# Altium PCB ESP32.PcbDoc
Units mm, origin at the board's own origin, x right, y up, seen from the top; angles counter-clockwise.
Board outline 152.4 x 101.6 mm, 2 copper layers (Top Layer, Bottom Layer); 40 components, 49 nets, 212 pads, 10 vias.
Unrouted connection lines stored in the file: 93.
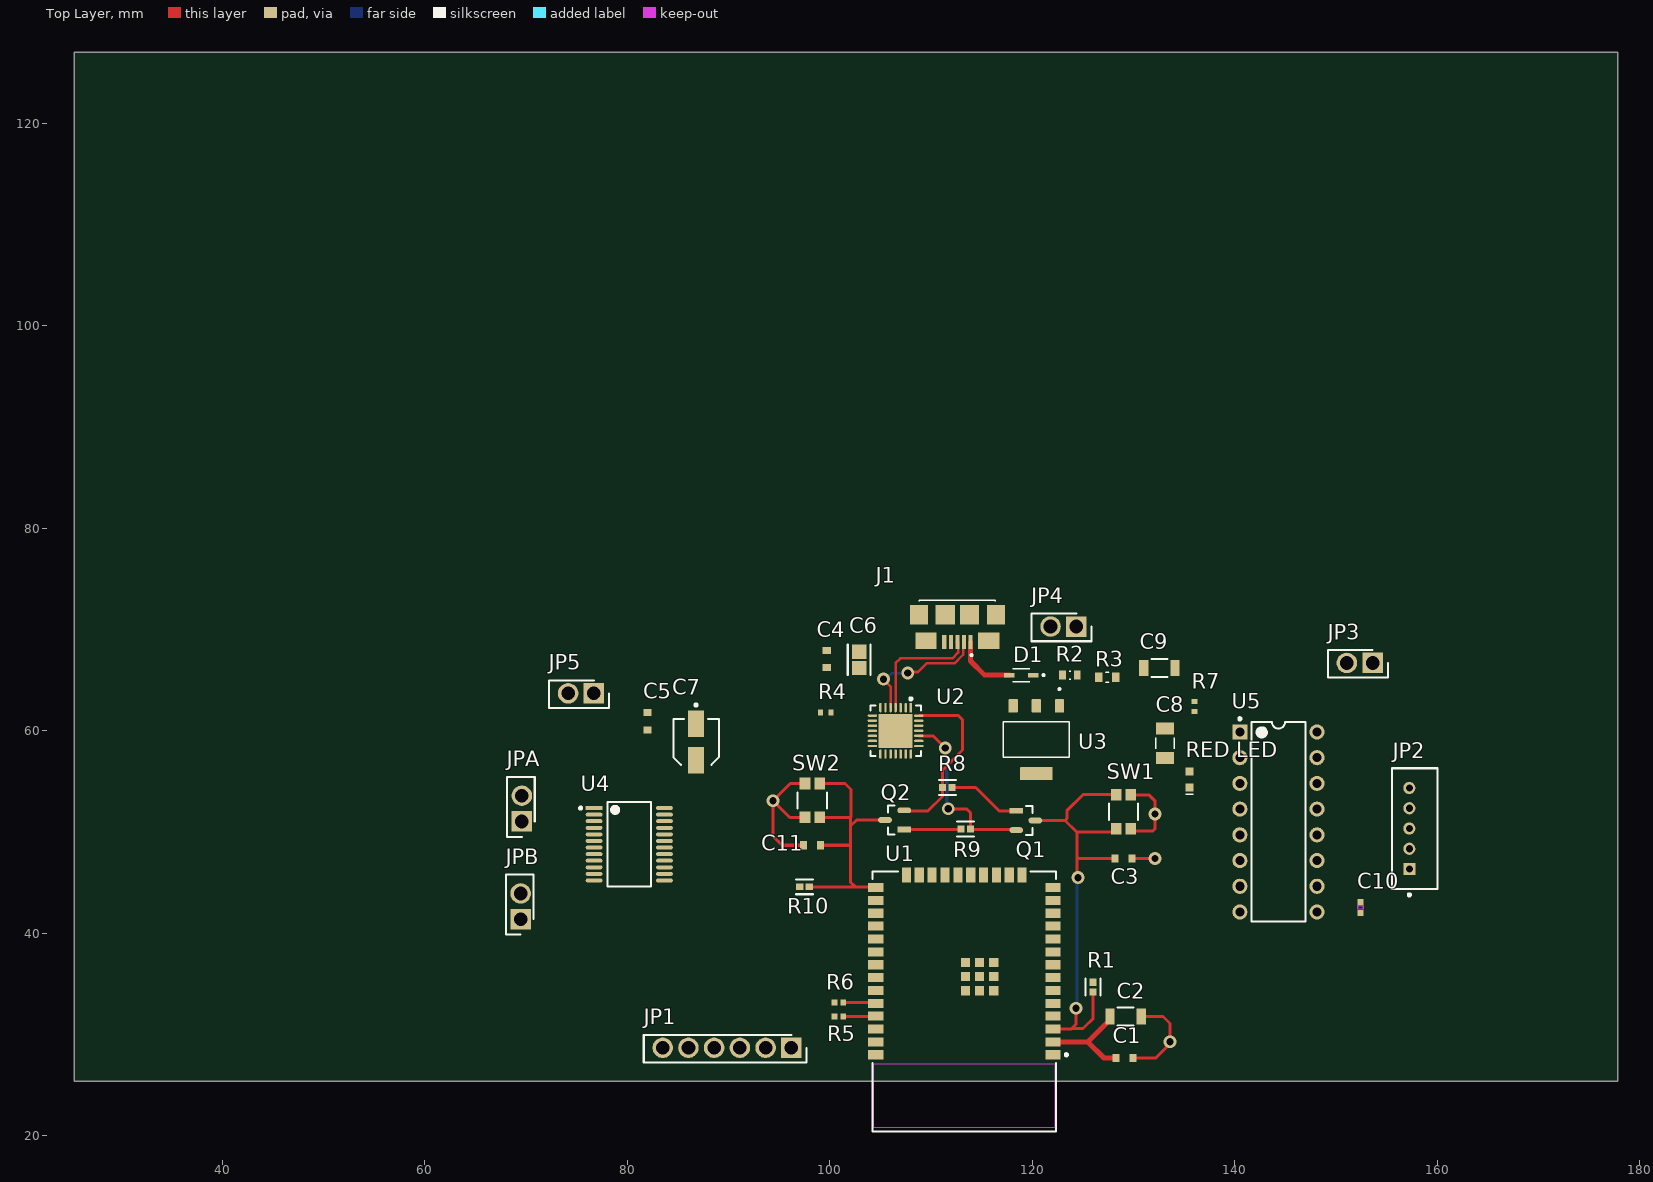
[diagram p0: Top Layer view]
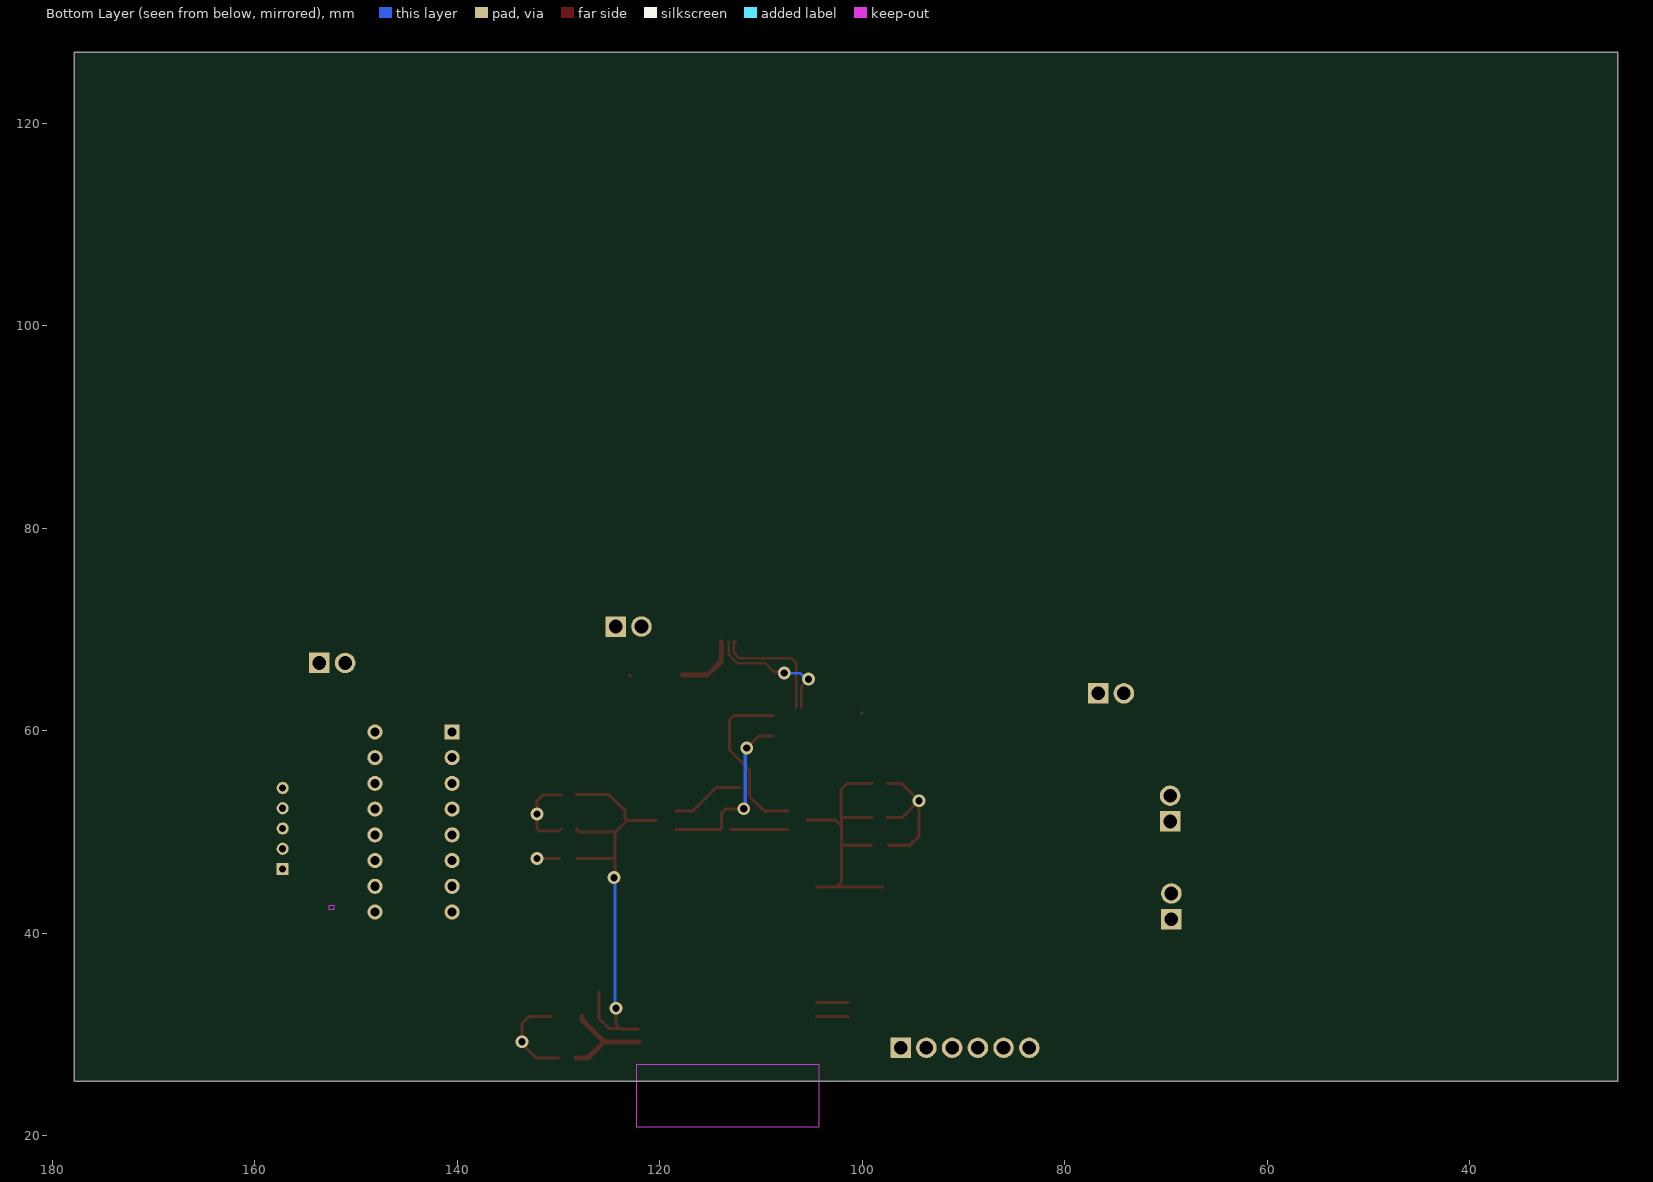
[diagram p1: Bottom Layer view, seen from below]

## Layer stack, top to bottom
Top Solder: solder mask 0.0102, Solder Resist, Dk 3.5
Top Layer: signal copper 0.0356
Dielectric 1: dielectric 0.32, FR-4, Dk 4.8
Bottom Layer: signal copper 0.0356
Bottom Solder: solder mask 0.0102, Solder Resist, Dk 3.5

## Board outline
25.4,25.4 177.8,25.4 177.8,127 25.4,127

## Design rules (kind name [scope] priority, off if disabled: settings)
Clearance [All] p1: gap=0.3 ignorepadtopadclearanceinfootprint=FALSE except(0.125: Arc-Text Track-Text SMDPad-Text THPad-Text Via-Text Fill-Text Poly-Text Region-Text Text-Text; 0.15: Arc-Arc Arc-Track Arc-Fill Arc-Poly Arc-Region Track-Track Track-Fill Track-Poly Track-Region Fill-Fill Fill-Poly Fill-Region Poly-Poly Poly-Region Region-Region; 0.2: Arc-SMDPad Track-SMDPad SMDPad-SMDPad; 0.25: Arc-THPad Arc-Hole Track-THPad Track-Hole SMDPad-THPad SMDPad-Hole THPad-THPad THPad-Hole Via-Hole Fill-Hole Poly-Hole Region-Hole Text-Hole)
DiffPairsRouting [All] p1: maxlimit=0.254 minlimit=0.2 mostfreqgap=0.25 toplayer_minwidth=0.2 toplayer_maxwidth=0.4 toplayer_prefwidth=0.25 bottomlayer_minwidth=0.2 bottomlayer_maxwidth=0.4 bottomlayer_prefwidth=0.25 maxuncoupledlength=12.7
HoleSize [All] p1: absolutevalues=TRUE maxlimit=0.45 minlimit=0.3 maxpercent=80.000 minpercent=20.000
HoleToHoleClearance [All] p1: gap=0.3 allowstackedmicrovias=TRUE
MinimumAnnularRing [All] p1: minimumring=0.2
PolygonConnect [All] p1: connectstyle=Relief reliefconductorwidth=0.254 reliefentries=4 polygonreliefangle="90 Angle" airgapwidth=0.254
RoutingVias [All] p1: holewidth=0.35 width=0.8 viastyle="Through Hole" minholewidth=0.3 minwidth=0.7 maxholewidth=0.45 maxwidth=0.85
SolderMaskExpansion [All] p1: expansion=0.102 istentingtop=FALSE
SupplyNets "Schematic Supply Nets_1" [InNet('VDD33')] p1: voltage=0.000
SupplyNets "Schematic Supply Nets" [InNet('GND')] p2: voltage=0.000
UnRoutedNet [All] p1: checkbadconnections=TRUE
Width [All] p1: maxlimit=0.5 minlimit=0.2 preferedwidth=0.3 minimp=50.000000 maximp=50.000000 favimp=50.000000
26 further rules are at their usual default settings.

## Classes and differential pairs
differential pair class DIFF90: USB_D
differential pair USB_D: +USB_D_P -USB_D_N

## Components (designator, comment, footprint, x,y, rotation, side; value= is the part's Value field where it differs from the comment)
C1 "0.1 µF ±10%, 50V" 885012206095 129.1,27.7 r180 top
C2 "22 µF ±20%, 10V" 885012108011 129.2,31.8 r180 top
C3 "0.1 µF ±10%, 50V" 885012206095 129,47.4 r180 top
C4 "0.1 µF ±10%, 50V" 885012206095 99.7,67.1 r270 top
C5 "0.1 µF ±10%, 50V" 885012206095 82,60.95 r90 top
C6 "4.7uF" FP-C0805C475J4RACAUTO-IPC_B 102.9,67 r90 top
C7 "10 µF" FP-UWT1C100MCL1GB-MFG 86.8,58.9 r270 top value=10uF
C8 "22uf 25V" CL31A226KAHNNNE 133.1,58.76 r90 top value=22uF
C9 "22 µF ±20%, 10V" 885012108011 132.55,66.2 r180 top
C10 "10nf" C0402C103K3REC7411 152.4,42.545 r270 top
C11 "0.1 µF ±10%, 50V" 885012206095 98.25,48.7 r0 top
D1 "BAT760-7" BAT760-7 118.91,65.5 r180 top
J1 "USB_CON" 10118192-0002LF 112.6,68.775 r180 top
JP1 "PPPC061LFBN-RC" PPPC061LFBN-RC 96.2,28.7 r180 top
JP2 "B5B-XH-A" FP-B5B-PH-K-S_LF_SN-MFG 157.776,50.355 r90 top
JP3 "PPTC021LFBN-RC" PPTC021LFBN-RC 153.6,66.7 r180 top
JP4 "PPTC021LFBN-RC" PPTC021LFBN-RC 124.34,70.3 r180 top
JP5 "PPTC021LFBN-RC" PPTC021LFBN-RC 76.7,63.7 r180 top
JPA "PPTC021LFBN-RC" PPTC021LFBN-RC 69.596,51.054 r90 top
JPB "PPTC021LFBN-RC" PPTC021LFBN-RC 69.469,41.402 r90 top
Q1 "SS8050-G" FP-SS8050-G-IPC_B 119.351,51.15 r0 top
Q2 "SS8050-G" FP-SS8050-G-IPC_B 106.4,51.2 r180 top
R1 "10k" FP-RC0402-0_4-IPC_A 126,34.7 r90 top value=10kR
R2 "47.5K" ERJ3EKF4752V 123.7,65.5 r0 top value=47.5kR
R3 "22.1K" RC0603FR-0722K1L 127.4,65.3 r180 top value=22.1kR
R4 "2K Ohm" 560112110015 99.6,61.8 r0 top
R5 "0k" CR0402AJ/-000GAS 100.9,31.8 r0 top
R6 "0k" CR0402AJ/-000GAS 100.9,33.154 r180 top
R7 "2K Ohm" 560112110015 136,62.4 r90 top
R8 "10k" FP-RC0402-0_4-IPC_A 111.6,54.4 r0 top value=10kR
R9 "10k" FP-RC0402-0_4-IPC_A 113.421,50.3 r180 top value=10kR
R10 "10k" FP-RC0402-0_4-IPC_A 97.5,44.6 r180 top value=10kR
"RED LED" "150060SS75000" 150060SS75000 135.5,55.2 r90 top
SW1 "434153017835" 434153017835 129,52 r270 top
SW2 "434153017835" 434153017835 98.275,53.125 r90 top
U1 "ESP32-WROOM-32E-N4" FP-ESP32-WROOM-32E_4MB-MFG 113.284,33.274 r180 top
U2 "CP2102N-A02-GQFN28" FP-CP2102N-A02-GQFN28-IPC_C 106.5,60 r270 top
U3 "3.3V reg" AMS1117-3.3 120.389,59.121 r270 top
U4 "TB6612FNG" FP-SSOP24-P-300-0_65A-IPC_B 80.2,48.8 r0 top
U5 "ULN2003A" STM-DIP-16L 144.3,51 r0 top

## Footprints (in the part's own frame and the unit in brackets; to place one, negate y for a bottom-side part, rotate by r counter-clockwise, add the part's x,y. Pads: shape width x height; smd on the part's side, far side on the other; paste and mask are expansions set on the pad)
150060SS75000 [mm] "SMD Mono-color Chip LED, body 1.6x0.8mm"
  rect 0.8x0.8 smd: 1(-0.8,0) 2(0.8,0)
  silkscreen extent -1.55,-0.4 -1.4,0.4, body extent -0.8,-0.4 0.8,0.4, height 0.7
10118192-0002LF [mm]
  rect 0.4x1.35 smd: 1(-1.3,0) 2(-0.65,0) 3(0,0) 4(0.65,0) 5(1.3,0)
  rect 2.1x1.6 smd: S1(-3.1,-0.125) S2(3.1,-0.125)
  rect 1.8x1.9 smd: S3(-3.8,-2.675) S6(3.8,-2.675)
  rect 1.9x1.9 smd: S4(-1.2,-2.675) S5(1.2,-2.675)
  silkscreen extent -3.75,-4.13 3.75,1.4, body extent -3.95,-4.82 3.95,0.28, height 2.7
434153017835 [mm] "Tact Switch, SMD, body 3.5x2.9mm"
  rect 1.15x1.05 smd: A1(-1.675,0.725) A2(1.675,0.725) B1(-1.675,-0.725) B2(1.675,-0.725)
  silkscreen extent -0.8,-1.45 0.8,1.45, body extent -2.15,-1.45 2.15,1.45, height 1.7
560112110015 [mm] "Fixed Thick Film, body 1.00 x 0.50 mm"
  rect 0.5x0.6 smd: 1(-0.5,0) 2(0.5,0)
  body extent -0.5,-0.25 0.5,0.25, height 0.35
885012108011 [mm] "Ceramic Capacitors, body 3.2x1.6mm"
  rect 0.9x1.6 smd: 1(-1.55,0) 2(1.55,0)
  silkscreen extent -0.8,-0.87 0.8,0.87, body extent -1.6,-0.8 1.6,0.8, height 1.25
885012206095 [mm] "Ceramic Capacitors, 0603, body 1.6x0.8mm"
  rect 0.7x0.8 smd: 1(-0.85,0) 2(0.85,0)
  body extent -0.8,-0.4 0.8,0.4, height 0.8
AMS1117-3.3 [mm]
  rrect15% 1.31x0.93 smd: 1(-3.345,2.29) 2(-3.345,0) 3(-3.345,-2.29)
  rrect15% 1.31x3.24 smd: 4(3.345,0)
  silkscreen extent -5.1,-3.25 1.75,3.25, body extent -3.5,-3.25 3.5,3.25, height 1.8
BAT760-7 [mm]
  rect 1.04x0.46 smd: A(1.19,0) C(-1.19,0)
  silkscreen extent -2.3,-0.65 0.85,0.65
C0402C103K3REC7411 [mm]
  rect 0.605x0.601 smd paste+0 mask+0: 1(-0.527,0) 2(0.527,0)
  Top Layer keep-out region: -0.174,-0.224 -0.174,0.224 0.174,0.224 0.174,-0.224
  Keep-Out Layer region: -0.174,-0.275 -0.174,0.275 0.174,0.275 0.174,-0.275
  body extent -0.53,-0.28 0.53,0.28, height 0.55
CL31A226KAHNNNE [mm]
  rect 1.2x1.82 smd: 1(-1.46,0) 2(1.46,0)
  silkscreen extent -0.54,-0.9 0.54,0.9
CR0402AJ/-000GAS [mm]
  rect 0.56x0.6 smd: 1(-0.435,0) 2(0.435,0)
  body extent -0.5,-0.25 0.5,0.25, height 0.37
ERJ3EKF4752V [mm]
  rect 0.65x0.9 smd: 1(-0.725,0) 2(0.725,0)
  silkscreen extent -0.08,-0.4 0.08,0.4
FP-B5B-PH-K-S_LF_SN-MFG [mm]
  rect 1.2x1.2 hole 0.7 paste-2539.97 mask+0: 1(-4,0.55)
  round 1.2 hole 0.7 paste-2539.97 mask+0: 2(-2,0.55) 3(0,0.55) 4(2,0.55) 5(4,0.55)
  silkscreen extent -6.67,-2.25 5.95,2.25, body extent -6.05,-2.35 6.05,2.35, height 0.25
FP-C0805C475J4RACAUTO-IPC_B [mm]
  rect 1.403x1.456 smd paste+0 mask+0: 1(-0.8,0) 2(0.8,0)
  silkscreen extent -1.5,-1.13 1.5,1.13, body extent -1.75,-0.98 1.75,0.98, height 0.25
FP-CP2102N-A02-GQFN28-IPC_C [mm]
  rect 0.931x0.242 smd paste+0 mask+0: 1(-2.291,1.5)
  rrect100% 0.931x0.242 smd paste+0 mask+0: 2(-2.291,1) 3(-2.291,0.5) 4(-2.291,0) 5(-2.291,-0.5) 6(-2.291,-1) 7(-2.291,-1.5) 15(2.291,-1.5) 16(2.291,-1) 17(2.291,-0.5) 18(2.291,0) 19(2.291,0.5) 20(2.291,1) 21(2.291,1.5)
  rrect100% 0.242x0.931 smd paste+0 mask+0: 8(-1.5,-2.291) 9(-1,-2.291) 10(-0.5,-2.291) 11(0,-2.291) 12(0.5,-2.291) 13(1,-2.291) 14(1.5,-2.291) 22(1.5,2.291) 23(1,2.291) 24(0.5,2.291) 25(0,2.291) 26(-0.5,2.291) 27(-1,2.291) 28(-1.5,2.291)
  rect 3.35x3.35 smd paste-1000 mask+0: 29(0,0)
  silkscreen extent -3.28,-2.5 2.5,2.5, body extent -2.86,-2.86 2.86,2.86, height 0.25
FP-ESP32-WROOM-32E_4MB-MFG [mm]
  rect 1.5x0.9 smd paste+0 mask+0: 1(-8.75,5.26) 2(-8.75,3.99) 3(-8.75,2.72) 4(-8.75,1.45) 5(-8.75,0.18) 6(-8.75,-1.09) 7(-8.75,-2.36) 8(-8.75,-3.63) 9(-8.75,-4.9) 10(-8.75,-6.17) 11(-8.75,-7.44) 12(-8.75,-8.71) 13(-8.75,-9.98) 14(-8.75,-11.25) 25(8.75,-11.25) 26(8.75,-9.98) 27(8.75,-8.71) 28(8.75,-7.44) 29(8.75,-6.17) 30(8.75,-4.9) 31(8.75,-3.63) 32(8.75,-2.36) 33(8.75,-1.09) 34(8.75,0.18) 35(8.75,1.45) 36(8.75,2.72) 37(8.75,3.99) 38(8.75,5.26)
  rect 0.9x1.5 smd paste+0 mask+0: 15(-5.71,-12.5) 16(-4.44,-12.5) 17(-3.17,-12.5) 18(-1.9,-12.5) 19(-0.63,-12.5) 20(0.64,-12.5) 21(1.91,-12.5) 22(3.18,-12.5) 23(4.45,-12.5) 24(5.72,-12.5)
  rect 0.9x0.9 smd paste+0 mask+0: 39(-2.9,-1.06) 39(-2.9,-3.86) 39(-2.9,-2.46) 39(-1.5,-1.06) 39(-1.5,-2.46) 39(-1.5,-3.86) 39(-0.1,-1.06) 39(-0.1,-2.46) 39(-0.1,-3.86)
  Keep-Out Layer region: -9.001,6.205 8.999,6.205 8.999,12.395 -9.001,12.395
  Keep-Out Layer region: -9.001,6.205 8.999,6.205 8.999,12.395 -9.001,12.395
  silkscreen extent -10.2,-12.83 9.08,12.83, body extent -9.6,-13.35 9.6,12.93, height 0.25
FP-RC0402-0_4-IPC_A [mm]
  rect 0.715x0.672 smd paste+0 mask+0: 1(-0.479,0) 2(0.479,0)
  silkscreen extent -0.84,-0.74 0.84,0.74, body extent -1.04,-0.54 1.04,0.54, height 0.25
FP-SS8050-G-IPC_B [mm]
  rect 1.357x0.572 smd paste+0 mask+0: 1(-0.951,0.95)
  rrect100% 1.357x0.572 smd paste+0 mask+0: 2(-0.951,-0.95) 3(0.951,0)
  silkscreen extent 0,-1.45 0.65,1.45, body extent -1.88,-1.7 1.88,1.7, height 0.25
FP-SSOP24-P-300-0_65A-IPC_B [mm]
  rect 1.654x0.392 smd paste+0 mask+0: 1(-3.475,3.575)
  rrect100% 1.654x0.392 smd paste+0 mask+0: 2(-3.475,2.925) 3(-3.475,2.275) 4(-3.475,1.625) 5(-3.475,0.975) 6(-3.475,0.325) 7(-3.475,-0.325) 8(-3.475,-0.975) 9(-3.475,-1.625) 10(-3.475,-2.275) 11(-3.475,-2.925) 12(-3.475,-3.575) 13(3.475,-3.575) 14(3.475,-2.925) 15(3.475,-2.275) 16(3.475,-1.625) 17(3.475,-0.975) 18(3.475,-0.325) 19(3.475,0.325) 20(3.475,0.975) 21(3.475,1.625) 22(3.475,2.275) 23(3.475,2.925) 24(3.475,3.575)
  silkscreen extent -4.93,-4.15 2.15,4.15, body extent -4.55,-4.4 4.55,4.4, height 0.25
FP-UWT1C100MCL1GB-MFG [mm]
  rect 2.6x1.6 smd paste+0 mask+0: 1(-1.8,0) 2(1.8,0)
  silkscreen extent -3.77,-2.25 2.25,2.25, body extent -3.35,-2.5 3.35,2.5, height 0.25
PPPC061LFBN-RC [mm]
  rect 2.025x2.025 hole 1.35: 1(0,0)
  round 2.025 hole 1.35: 2(2.54,0) 3(5.08,0) 4(7.62,0) 5(10.16,0) 6(12.7,0)
  silkscreen extent -1.52,-1.27 14.57,1.46, body extent -1.52,-1.27 14.22,1.27, height 8.5
PPTC021LFBN-RC [mm]
  rect 2.025x2.025 hole 1.35: 1(0,0)
  round 2.025 hole 1.35: 2(2.54,0)
  silkscreen extent -1.52,-1.27 4.41,1.46, body extent -1.52,-1.27 4.06,1.27, height 8.5
RC0603FR-0722K1L [mil]
  rect 30x37 smd: 1(-33,0) 2(33,0)
  silkscreen extent -5,-19 5,19
STM-DIP-16L [mm] "DIP, 16-Leads, Body 19.7x7.1mm, Pitch 2.54mm"
  rect 1.5x1.5 hole 0.9: 1(-3.81,8.89)
  round 1.5 hole 0.9: 2(-3.81,6.35) 3(-3.81,3.81) 4(-3.81,1.27) 5(-3.81,-1.27) 6(-3.81,-3.81) 7(-3.81,-6.35) 8(-3.81,-8.89) 9(3.81,-8.89) 10(3.81,-6.35) 11(3.81,-3.81) 12(3.81,-1.27) 13(3.81,1.27) 14(3.81,3.81) 15(3.81,6.35) 16(3.81,8.89)
  silkscreen extent -3.93,-9.85 2.65,10.31, body extent -3.95,-9.85 3.95,9.85, height 5.33

## Part data
C1 C3 C4 C5 C11: library part 885012206095, "0.1 µF ±10% 50V Ceramic Capacitor X7R 0603 (1608 Metric)", Capacitor Type=Ceramic, Manufacturer="Wurth Electronics", Supplier Part Number=732-8013-1-ND, Category="Ceramic Capacitors", ComponentLink1Description=https://datasheet.ciiva.com:443/pdfs/VipMasterIC/IC/MIDC/MIDC-S-A0001525459/MIDC-S-A0001525484-1.pdf?src-supplier=IHS+Markit, ComponentLink1URL=https://datasheet.ciiva.com:443/pdfs/VipMasterIC/IC/MIDC/MIDC-S-A0001525459/MIDC-S-A0001525484-1.pdf?src-supplier=IHS+Markit, ComponentLink2Description=http://www.farnell.com/datasheets/1958488.pdf?src-supplier=Farnell, ComponentLink2URL=http://www.farnell.com/datasheets/1958488.pdf?src-supplier=Farnell, ComponentLink3Description=http://www.farnell.com/datasheets/1958488.pdf?src-supplier=Element14, ComponentLink3URL=http://www.farnell.com/datasheets/1958488.pdf?src-supplier=Element14, ComponentLink4Description=https://katalog.we-online.de/pbs/datasheet/885012206095.pdf?src-supplier=Digikey, ComponentLink4URL=https://katalog.we-online.de/pbs/datasheet/885012206095.pdf?src-supplier=Digikey, ComponentLink5Description=http://www.farnell.com/datasheets/1958488.pdf?src-supplier=Newark, ComponentLink5URL=http://www.farnell.com/datasheets/1958488.pdf?src-supplier=Newark, ComponentLink6Description=https://datasheet.octopart.com/885012206095-W%C3%BCrth-Elektronik-datasheet-152756925.pdf?src-supplier=Element14, ComponentLink6URL=https://datasheet.octopart.com/885012206095-W%C3%BCrth-Elektronik-datasheet-152756925.pdf?src-supplier=Element14, Dielectric Material=Ceramic, Manufacturer Part Number=885012206095, Pins=2, Pricing="1=0.1, 10=0.051, 100=0.045, 500=0.0396 (USD)", Reach SVHC Compliant=Yes, RoHS=Yes, RoHS Compliant=Yes, Stock=81752, Supplier=Digikey
C2 C9: library part 885012108011, "22 µF ±20% 10V Ceramic Capacitor X5R 1206 (3216 Metric)", Capacitor Type=Ceramic, Manufacturer="Wurth Electronics", Supplier Part Number=732-7637-1-ND, Category="Ceramic Capacitors", ComponentLink1Description=https://datasheet.ciiva.com:443/pdfs/VipMasterIC/IC/MIDC/MIDC-S-A0001526153/MIDC-S-A0001526191-1.pdf?src-supplier=IHS+Markit, ComponentLink1URL=https://datasheet.ciiva.com:443/pdfs/VipMasterIC/IC/MIDC/MIDC-S-A0001526153/MIDC-S-A0001526191-1.pdf?src-supplier=IHS+Markit, ComponentLink2Description=http://www.farnell.com/datasheets/2031775.pdf?src-supplier=Farnell, ComponentLink2URL=http://www.farnell.com/datasheets/2031775.pdf?src-supplier=Farnell, ComponentLink3Description=https://katalog.we-online.de/pbs/datasheet/885012108011.pdf?src-supplier=Digikey, ComponentLink3URL=https://katalog.we-online.de/pbs/datasheet/885012108011.pdf?src-supplier=Digikey, Dielectric Material=Ceramic, Manufacturer Part Number=885012108011, Pins=2, Pricing="1=0.68, 10=0.611, 100=0.5481, 500=0.4851 (USD)", Reach SVHC Compliant=Yes, RoHS=Yes, RoHS Compliant=Yes, Stock=3497, Supplier=Digikey
C6: library part C0805C475J4RACAUTO, "4.7 µF ±5% 16V Ceramic Capacitor X7R 0805 (2012 Metric)", Capacitor Type=Ceramic, Manufacturer=KEMET, Supplier Part Number=399-15716-1-ND, Category="Ceramic Capacitors", ComponentLink1Description=https://datasheet.ciiva.com:443/pdfs/VipMasterIC/IC/KEME/KEME-S-A0009891634/KEME-S-A0009891634-1.pdf?src-supplier=IHS+Markit, ComponentLink1URL=https://datasheet.ciiva.com:443/pdfs/VipMasterIC/IC/KEME/KEME-S-A0009891634/KEME-S-A0009891634-1.pdf?src-supplier=IHS+Markit, ComponentLink2Description=http://www.farnell.com/datasheets/2741387.pdf?src-supplier=Farnell, ComponentLink2URL=http://www.farnell.com/datasheets/2741387.pdf?src-supplier=Farnell, ComponentLink3Description=http://www.farnell.com/datasheets/2741387.pdf?src-supplier=Newark, ComponentLink3URL=http://www.farnell.com/datasheets/2741387.pdf?src-supplier=Newark, ComponentLink4Description=https://api.kemet.com/component-edge/download/datasheet/C0805C475J4RACAUTO.pdf?src-supplier=Digikey, ComponentLink4URL=https://api.kemet.com/component-edge/download/datasheet/C0805C475J4RACAUTO.pdf?src-supplier=Digikey, ComponentLink5Description=https://datasheet.octopart.com/C0805C475J4RACAUTO-KEMET-datasheet-149524417.pdf?src-supplier=Farnell, ComponentLink5URL=https://datasheet.octopart.com/C0805C475J4RACAUTO-KEMET-datasheet-149524417.pdf?src-supplier=Farnell, ComponentLink6Description=https://datasheet.octopart.com/C0805C475J4RACAUTO-KEMET-datasheet-136484028.pdf?src-supplier=TME, ComponentLink6URL=https://datasheet.octopart.com/C0805C475J4RACAUTO-KEMET-datasheet-136484028.pdf?src-supplier=TME, Dielectric Material=Ceramic, JESD-609 Code=e3, Manufacturer Part Number=C0805C475J4RACAUTO, Pins=2, Pricing="1=0.54, 10=0.361, 100=0.2378, 1000=0.18294 (USD)", Reach SVHC Compliant=Yes, RoHS=Yes, RoHS Compliant=Yes, Stock=14100, Supplier=Digikey, Terminal Finish=Nickel
C7: library part UWT1C100MCL1GB, "10 µF 16 V Aluminum Electrolytic Capacitors Radial, Can - SMD 1000 Hrs @ 105°C", Capacitor Type=Aluminium, Case/Package=1717, Leakage Current=3uA, Manufacturer=Nichicon, Max Operating Temperature=105°C, Min Operating Temperature=-55°C, Package Shape=Cylindrical, Package Style=SMTMeter, Rated DC Voltage (URdc)=16V, Ripple Current=14mA, Supplier Part Number=493-2173-1-ND, Tolerance  (fill in as +-)=20%, Category="Aluminum Electrolytic Capacitors", ComponentLink1Description=https://datasheet.ciiva.com:443/pdfs/VipMasterIC/IC/NICH/NICH-S-A0009252174/NICH-S-A0009252174-1.pdf?src-supplier=IHS+Markit, ComponentLink1URL=https://datasheet.ciiva.com:443/pdfs/VipMasterIC/IC/NICH/NICH-S-A0009252174/NICH-S-A0009252174-1.pdf?src-supplier=IHS+Markit, ComponentLink2Description=https://datasheet.ciiva.com/96/e-wt-96198.pdf?src-supplier=Digikey, ComponentLink2URL=https://datasheet.ciiva.com/96/e-wt-96198.pdf?src-supplier=Digikey, ComponentLink3Description=https://datasheet.ciiva.com/96/e-wt-96199.pdf?src-supplier=Digikey, ComponentLink3URL=https://datasheet.ciiva.com/96/e-wt-96199.pdf?src-supplier=Digikey, ComponentLink4Description=https://datasheet.ciiva.com/96/e-wt-96200.pdf?src-supplier=Digikey, ComponentLink4URL=https://datasheet.ciiva.com/96/e-wt-96200.pdf?src-supplier=Digikey, ComponentLink5Description=https://datasheet.ciiva.com/16392/e-wt-16392925.pdf?src-supplier=Future+Electronics, ComponentLink5URL=https://datasheet.ciiva.com/16392/e-wt-16392925.pdf?src-supplier=Future+Electronics, Dielectric Material=Aluminium, Height=5.4mm, JESD-609 Code=e6, Length=4.6mm, Manufacturer Part Number=UWT1C100MCL1GB, Mounting Technology="Surface Mount", Packaging="Tape and Reel", Pins=2, Polarity=Polarized, Pricing="1=0.29, 10=0.189, 50=0.1452, 100=0.1309, 500=0.1049, 1000=0.09623 (USD)", Reach SVHC Compliant=No, RoHS=Yes, RoHS Compliant=Yes, Stock=73707, Supplier=Digikey, Tan Delta=0.2, Terminal Finish=Tin, Termination="One Surface", Tolerance (fill in as +-)=20%, Width=4.3mm
C8: library part CL31A226KAHNNNE, "22 µF ±10% 25V Ceramic Capacitor X5R 1206 (3216 Metric)", Capacitor Type=Ceramic, Case/Package=1206, Manufacturer=Samsung, Max Operating Temperature=85°C, Min Operating Temperature=-55°C, Package Shape=Rectangular, Package Style=SMTMeter, Rated DC Voltage (URdc)=25V, Supplier Part Number=1276-3047-1-ND, Temperature Characteristics Code=X5R, Tolerance  (fill in as +-)=10%, Category="Ceramic Capacitors", ComponentLink1Description=https://datasheet.ciiva.com:443/pdfs/VipMasterIC/IC/SEMS/SEMS-S-A0008384515/SEMS-S-A0008873224-1.pdf?src-supplier=IHS+Markit, ComponentLink1URL=https://datasheet.ciiva.com:443/pdfs/VipMasterIC/IC/SEMS/SEMS-S-A0008384515/SEMS-S-A0008873224-1.pdf?src-supplier=IHS+Markit, ComponentLink2Description=https://datasheet.ciiva.com/29201/452249-da-01-en-vs-kondensator-1206-29201336.pdf?src-supplier=Conrad, ComponentLink2URL=https://datasheet.ciiva.com/29201/452249-da-01-en-vs-kondensator-1206-29201336.pdf?src-supplier=Conrad, Dielectric Material=Ceramic, Height=1.8mm, JESD-609 Code=e3, Length=3.2mm, Manufacturer Part Number=CL31A226KAHNNNE, Mounting Technology="Surface Mount", Multilayer=Yes, Packaging="Tape and Reel", Pins=2, Pricing="1=0.22, 10=0.134, 100=0.1016, 1000=0.0768 (USD)", Reach SVHC Compliant=Yes, RoHS=Yes, RoHS Compliant=Yes, Stock=848165, Supplier=Digikey, Terminal Finish=Nickel, Termination=Wraparound, Tolerance (fill in as +-)=10%, Width=1.6mm
C10: library part C0402C103K3REC7411, "10 nF ±10% 25V Ceramic Capacitor X7R 0402 (1005 Metric)", Capacitor Type=Ceramic, Manufacturer=KEMET, Supplier Part Number=399-C0402C103K3REC7411CT-ND, Category="Ceramic Capacitors", ComponentLink1Description=https://datasheet.ciiva.com:443/pdfs/VipMasterIC/IC/KEME/KEME-S-A0008958450/KEME-S-A0008958450-1.pdf?src-supplier=IHS+Markit, ComponentLink1URL=https://datasheet.ciiva.com:443/pdfs/VipMasterIC/IC/KEME/KEME-S-A0008958450/KEME-S-A0008958450-1.pdf?src-supplier=IHS+Markit, ComponentLink2Description=https://api.kemet.com/component-edge/download/datasheet/C0402C103K3REC7411.pdf?src-supplier=Digikey, ComponentLink2URL=https://api.kemet.com/component-edge/download/datasheet/C0402C103K3REC7411.pdf?src-supplier=Digikey, Dielectric Material=Ceramic, Manufacturer Part Number=C0402C103K3REC7411, Pins=2, Pricing="1=0.1, 10=0.052, 100=0.0335, 1000=0.02108, 2500=0.01861, 5000=0.01838 (USD)", Reach SVHC Compliant=Yes, RoHS=Yes, RoHS Compliant=Yes, Stock=35408, Supplier=Digikey
D1: "Rectifier Diode, Schottky, 1 Phase, 1 Element, 1A, 30V V(RRM), Silicon", Forward Voltage=270mV, Manufacturer=Diodes, Max Operating Temperature=125°C, Max Output current=1A, Max Power Dissipation=235mW, Min Operating Temperature=-65°C, Non-rep Pk Forward Current-Max=5.5A, Package Body Material=Plastic, Package Shape=Rectangular, Package Style="SMALL OUTLINEMeter", Peak Reflow Temperature (Cel)=260°C, Rep Pk Reverse Voltage-Max=30V, Supplier Part Number=BAT760DICT-ND, Time @ Peak Reflow Temperature-Max (s)=40s, Additional Feature="HIGH RELIABILITY", Category="Rectifier Diodes", ComponentLink1Description=https://datasheet.ciiva.com:443/pdfs/VipMasterIC/IC/DIOD/DIOD-S-A0004140720/DIOD-S-A0004140720-1.pdf?src-supplier=IHS+Markit, ComponentLink1URL=https://datasheet.ciiva.com:443/pdfs/VipMasterIC/IC/DIOD/DIOD-S-A0004140720/DIOD-S-A0004140720-1.pdf?src-supplier=IHS+Markit, ComponentLink2Description=https://datasheet.ciiva.com/8301/ds30498-8301400.pdf?src-supplier=Avnet, ComponentLink2URL=https://datasheet.ciiva.com/8301/ds30498-8301400.pdf?src-supplier=Avnet, ComponentLink3Description=https://datasheet.ciiva.com/4715/ds30498-63155-4715521.pdf?src-supplier=Mouser, ComponentLink3URL=https://datasheet.ciiva.com/4715/ds30498-63155-4715521.pdf?src-supplier=Mouser, ComponentLink4Description=https://datasheet.ciiva.com/1178/ds30498-1178033.pdf?src-supplier=Element14, ComponentLink4URL=https://datasheet.ciiva.com/1178/ds30498-1178033.pdf?src-supplier=Element14, ComponentLink5Description=https://datasheet.ciiva.com/914/ds30498-914551.pdf?src-supplier=Digikey, ComponentLink5URL=https://datasheet.ciiva.com/914/ds30498-914551.pdf?src-supplier=Digikey, ComponentLink6Description=https://datasheet.ciiva.com/914/ds30498-914552.pdf?src-supplier=Digikey, ComponentLink6URL=https://datasheet.ciiva.com/914/ds30498-914552.pdf?src-supplier=Digikey, ComponentLink7Description=https://datasheet.ciiva.com/914/ds30498-914553.pdf?src-supplier=Digikey, ComponentLink7URL=https://datasheet.ciiva.com/914/ds30498-914553.pdf?src-supplier=Digikey, ComponentLink8Description=https://datasheet.ciiva.com/22695/1670989-22695799.pdf?src-supplier=Element14, ComponentLink8URL=https://datasheet.ciiva.com/22695/1670989-22695799.pdf?src-supplier=Element14, Diode Element Material=SILICON, Diode Type=RECTIFIER, JESD-30 Code=R-PDSO-G2, JESD-609 Code=e3, Manufacturer Part Number=BAT760-7, Moisture Sensitivity Level=1, Number of Elements=1, Pins=2, Pricing="1=0.55, 10=0.273, 100=0.2336, 500=0.17744, 1000=0.16605 (USD)", Qualification Status="Not Qualified", Reach SVHC Compliant=Yes, RoHS=Yes, RoHS Compliant=Yes, Stock=17947, Supplier=Digikey, Surface Mount=Yes, Technology=SCHOTTKY, Terminal Finish=Tin, Terminal Form="Gull Wing", Terminal Position=DUAL
J1: library part 10118192-0002LF, "Conn Micro USB 2.0 Type B RCP 5 POS 0.65mm Solder RA SMD 5 Terminal 1 Port T/R", Manufacturer="Amphenol ICC / FCI", Supplier Part Number=2208500, Category="USB Connectors", ComponentLink1Description=http://www.amphenol-icc.com/media/wysiwyg/files/drawing/10118192.pdf?src-supplier=Digikey, ComponentLink1URL=http://www.amphenol-icc.com/media/wysiwyg/files/drawing/10118192.pdf?src-supplier=Digikey, Manufacturer Part Number=10118192-0002LF, RoHS=No, Stock=100, Supplier=Rs
JP1: "Board Connector, 6 Contact(s), 1 Row(s), Female, Straight, 0.1 inch Pitch, Solder Terminal, Locking, Socket", Manufacturer=Sullins, Manufacturer Series=PP, Rated Current (Signal)=3A, Supplier Part Number=S7039-ND, Body Breadth=0.094inch, Body Depth=0.334inch, Body Length=0.62inch, Category="Headers and Wire Housings", ComponentLink1Description=https://datasheet.ciiva.com:443/pdfs/VipMasterIC/IC/SUCS/SUCSS00270/SUCSS00270-1.pdf?src-supplier=IHS+Markit, ComponentLink1URL=https://datasheet.ciiva.com:443/pdfs/VipMasterIC/IC/SUCS/SUCSS00270/SUCSS00270-1.pdf?src-supplier=IHS+Markit, ComponentLink2Description=https://media.digikey.com/pdf/Data%20Sheets/Sullins%20PDFs/Female_Headers.100_DS.pdf?src-supplier=Digikey, ComponentLink2URL=https://media.digikey.com/pdf/Data%20Sheets/Sullins%20PDFs/Female_Headers.100_DS.pdf?src-supplier=Digikey, Connector Type="BOARD CONNECTOR", Contact Finish - Mating=AU, Contact Gender=Female, Contact Material=Bronze, Contact Pattern=RECTANGULAR, Contact Style="SQ PIN-SKT", Insulation Material=Polyester, Manufacturer Part Number=PPPC061LFBN-RC, Mating Contact Pitch=0.1inch, Mounting Option 1=LOCKING, Mounting Style=STRAIGHT, Mounting Technology=Board, Number Of Connectors=1, Number of Contacts=6, Number Of PCB Rows=1, Number of Rows Loaded=1, PCB Contact Pattern=RECTANGULAR, Polarization Key="POLARIZED HOUSING", Pricing="1=0.47, 10=0.398, 80=0.34363, 440=0.30461, 1000=0.28745, 5000=0.25659, 10000=0.24434 (USD)", Reach SVHC Compliant=Yes, Reference Standard=UL, Reliability=COMMERCIAL, RoHS=Yes, RoHS Compliant=Yes, Stock=15403, Supplier=Digikey, Terminal Length=0.125inch, Terminal Pitch=2.54mm, Termination=Solder
JP2: "Connector Header Through Hole 5 position 0.098\" (2.50mm)", Manufacturer=JST, Supplier Part Number=455-B5B-XH-A-ND, Category="Headers and Wire Housings", ComponentLink1Description=https://www.distrelec.biz/Web/Downloads/_t/ds/xh-series_eng_tds.pdf?mime=application%2Fpdf&src-supplier=Distrelec, ComponentLink1URL=https://www.distrelec.biz/Web/Downloads/_t/ds/xh-series_eng_tds.pdf?mime=application%2Fpdf&src-supplier=Distrelec, Manufacturer Part Number=B5B-XH-A, Pricing="1=0.21, 10=0.178, 100=0.1513, 500=0.13504, 1000=0.12858, 5000=0.11476, 10000=0.10929 (USD)", RoHS=Yes, Stock=211742, Supplier=Digikey
JP3 JP4 JP5 JPA JPB: "2 Position Header Connector 0.100\" (2.54mm) Through Hole Tin", Manufacturer=Sullins, Manufacturer Series=PP, Rated Current (Signal)=3A, Supplier Part Number=S7000-ND, Body Breadth=0.094inch, Body Depth=0.334inch, Body Length=0.22inch, Category=Connectors, ComponentLink1Description=https://datasheet.ciiva.com:443/pdfs/VipMasterIC/IC/SUCS/SUCSS00270/SUCSS00270-1.pdf?src-supplier=IHS+Markit, ComponentLink1URL=https://datasheet.ciiva.com:443/pdfs/VipMasterIC/IC/SUCS/SUCSS00270/SUCSS00270-1.pdf?src-supplier=IHS+Markit, ComponentLink2Description=https://media.digikey.com/pdf/Data%20Sheets/Sullins%20PDFs/Female_Headers.100_DS.pdf?src-supplier=Digikey, ComponentLink2URL=https://media.digikey.com/pdf/Data%20Sheets/Sullins%20PDFs/Female_Headers.100_DS.pdf?src-supplier=Digikey, ComponentLink3Description=http://www.sullinscorp.com/catalogs/78_Page80-81_HEADER_.100_2.54mm_FEMALE.pdf?src-supplier=Future+Electronics, ComponentLink3URL=http://www.sullinscorp.com/catalogs/78_Page80-81_HEADER_.100_2.54mm_FEMALE.pdf?src-supplier=Future+Electronics, ComponentLink4Description=https://datasheet.octopart.com/PPTC021LFBN-RC-Sullins-datasheet-41308905.pdf?src-supplier=Future+Electronics, ComponentLink4URL=https://datasheet.octopart.com/PPTC021LFBN-RC-Sullins-datasheet-41308905.pdf?src-supplier=Future+Electronics, Connector Type="BOARD CONNECTOR", Contact Finish - Mating=SN, Contact Finish - Termination="Tin (Sn) - with Nickel (Ni) barrier", Contact Gender=Female, Contact Material=Bronze, Contact Pattern=RECTANGULAR, Contact Style="SQ PIN-SKT", Insulation Material=Polyester, JESD-609 Code=e3, Manufacturer Part Number=PPTC021LFBN-RC, Mating Contact Pitch=0.1inch, Mounting Option 1=LOCKING, Mounting Style=STRAIGHT, Mounting Technology=Board, Number Of Connectors=1, Number of Contacts=2, Number Of PCB Rows=1, Number of Rows Loaded=1, PCB Contact Pattern=RECTANGULAR, Polarization Key="POLARIZED HOUSING", Pricing="1=0.26, 10=0.221, 100=0.1875, 500=0.1673, 1000=0.1593, 5000=0.14219, 10000=0.1354 (USD)", Reach SVHC Compliant=Yes, Reference Standard=UL, Reliability=COMMERCIAL, RoHS=Yes, RoHS Compliant=Yes, Stock=25108, Supplier=Digikey, Terminal Length=0.125inch, Terminal Pitch=2.54mm, Termination=Solder
Q1 Q2: "Bipolar (BJT) Transistor NPN 25 V 1.5 A 100MHz 300 mW Surface Mount SOT-23-3", Manufacturer=Comchip, Supplier Part Number=641-1790-1-ND, Category=Transistors, ComponentLink1Description=https://datasheet.ciiva.com:443/pdfs/VipMasterIC/IC/COMC/COMC-S-A0004994192/COMC-S-A0004994192-1.pdf?src-supplier=IHS+Markit, ComponentLink1URL=https://datasheet.ciiva.com:443/pdfs/VipMasterIC/IC/COMC/COMC-S-A0004994192/COMC-S-A0004994192-1.pdf?src-supplier=IHS+Markit, ComponentLink2Description="http://www.comchiptech.com/admin/files/product/SS8050-G RevA181526.pdf?src-supplier=Digikey", ComponentLink2URL="http://www.comchiptech.com/admin/files/product/SS8050-G RevA181526.pdf?src-supplier=Digikey", Manufacturer Part Number=SS8050-G, Pricing="1=0.24, 10=0.148, 100=0.0921, 500=0.06754, 1000=0.05958 (USD)", Reach SVHC Compliant=Yes, RoHS=Yes, RoHS Compliant=Yes, Stock=149685, Supplier=Digikey
R1 R8 R9 R10: library part RC0402JR-0710KL, "10 kOhms ±5% 0.063W, 1/16W Chip Resistor 0402 (1005 Metric) Moisture Resistant Thick Film", Case/Package=0402, Manufacturer=Yageo, Max Operating Temperature=155°C, Min Operating Temperature=-55°C, Package Height=0.35mm, Package Length=1mm, Package Shape=Rectangular, Package Width=0.5mm, Power=62.5mW, Rated Temperature=70°C, Resistor Type="FIXED RESISTOR", Supplier Part Number=311-10KJRCT-ND, Temperature Coefficient (ppm/Cel)=100, Tolerance=5%, Working Voltage=50V, Additional Feature="LASER TRIMMABLE", Category="Chip SMD Resistors", ComponentLink1Description=https://datasheet.ciiva.com:443/pdfs/VipMasterIC/IC/YAGO/YAGO-S-A0008145938/YAGO-S-A0008145938-1.pdf?src-supplier=IHS+Markit, ComponentLink1URL=https://datasheet.ciiva.com:443/pdfs/VipMasterIC/IC/YAGO/YAGO-S-A0008145938/YAGO-S-A0008145938-1.pdf?src-supplier=IHS+Markit, ComponentLink2Description=https://datasheet.ciiva.com/2452/pyu-r-int-thick-7-2452627.pdf?src-supplier=Digikey, ComponentLink2URL=https://datasheet.ciiva.com/2452/pyu-r-int-thick-7-2452627.pdf?src-supplier=Digikey, ComponentLink3Description=https://datasheet.ciiva.com/2452/pyu-r-int-thick-7-2452628.pdf?src-supplier=Digikey, ComponentLink3URL=https://datasheet.ciiva.com/2452/pyu-r-int-thick-7-2452628.pdf?src-supplier=Digikey, ComponentLink4Description=https://datasheet.ciiva.com/2452/pyu-r-int-thick-7-2452626.pdf?src-supplier=Digikey, ComponentLink4URL=https://datasheet.ciiva.com/2452/pyu-r-int-thick-7-2452626.pdf?src-supplier=Digikey, ComponentLink5Description=https://datasheet.ciiva.com/12669/pyu-rc0402-51-rohs-l-6-r-12669687.pdf?src-supplier=Mouser, ComponentLink5URL=https://datasheet.ciiva.com/12669/pyu-rc0402-51-rohs-l-6-r-12669687.pdf?src-supplier=Mouser, ComponentLink6Description=https://datasheet.ciiva.com/7850/1018594-7850137.pdf?src-supplier=Element14, ComponentLink6URL=https://datasheet.ciiva.com/7850/1018594-7850137.pdf?src-supplier=Element14, ComponentLink7Description=https://datasheet.ciiva.com/7850/1018594-7850136.pdf?src-supplier=Element14, ComponentLink7URL=https://datasheet.ciiva.com/7850/1018594-7850136.pdf?src-supplier=Element14, Construction=Chip, JESD-609 Code=e3, Manufacturer Part Number=RC0402JR-0710KL, Mounting Technology="Surface Mount", Packaging="Tape and Reel", Pins=2, Pricing="1=0.1, 10=0.007, 50=0.0066, 100=0.0061, 500=0.0051, 1000=0.00408 (USD)", Reach SVHC Compliant=Yes, RoHS=Yes, RoHS Compliant=Yes, Stock=17927190, Supplier=Digikey, Technology="METAL GLAZE/THICK FILM", Terminal Finish=Nickel, Termination=Wraparound
R2: library part ERJ-3EKF4752V, "47.5 kOhms ±1% 0.1W, 1/10W Chip Resistor 0603 (1608 Metric) Automotive AEC-Q200 Thick Film", Case/Package=0603, Manufacturer=Panasonic, Max Operating Temperature=155°C, Min Operating Temperature=-55°C, Package Height=0.45mm, Package Length=1.6mm, Package Shape=Rectangular, Package Width=0.8mm, Power=100mW, Rated Temperature=70°C, Resistor Type="FIXED RESISTOR", Supplier Part Number=P47.5KHCT-ND, Temperature Coefficient (ppm/Cel)=100, Tolerance=1%, Working Voltage=75V, Category="Chip SMD Resistors", ComponentLink1Description=https://datasheet.ciiva.com:443/pdfs/VipMasterIC/IC/PANA/PANA-S-A0009889626/PANA-S-A0009889626-1.pdf?src-supplier=IHS+Markit, ComponentLink1URL=https://datasheet.ciiva.com:443/pdfs/VipMasterIC/IC/PANA/PANA-S-A0009889626/PANA-S-A0009889626-1.pdf?src-supplier=IHS+Markit, Construction=Rectangular, JESD-609 Code=e3, Manufacturer Part Number=ERJ-3EKF4752V, Mounting Technology="Surface Mount", Packaging="Tape and Reel", Pins=2, Pricing="1=0.1, 10=0.035, 100=0.0177, 1000=0.01014, 2500=0.00847 (USD)", Reach SVHC Compliant=Yes, Reference Standard=AEC-Q200, RoHS=Yes, RoHS Compliant=Yes, Stock=242020, Supplier=Digikey, Technology="METAL GLAZE/THICK FILM", Terminal Finish=Nickel, Termination=Wraparound
R3: library part RC0603FR-0722K1L, "22.1 kOhms ±1% 0.1W, 1/10W Chip Resistor 0603 (1608 Metric) Moisture Resistant Thick Film", Case/Package=0603, Manufacturer=Yageo, Max Operating Temperature=155°C, Min Operating Temperature=-55°C, Package Height=0.45mm, Package Length=1.6mm, Package Shape=Rectangular, Package Width=0.8mm, Power=100mW, Rated Temperature=70°C, Resistor Type="FIXED RESISTOR", Supplier Part Number=311-22.1KHRCT-ND, Temperature Coefficient (ppm/Cel)=100, Tolerance=1%, Working Voltage=75V, Additional Feature="LASER TRIMMABLE", Category="Chip SMD Resistors", ComponentLink1Description=https://datasheet.ciiva.com:443/pdfs/VipMasterIC/IC/YAGO/YAGO-S-A0008145938/YAGO-S-A0008145938-1.pdf?src-supplier=IHS+Markit, ComponentLink1URL=https://datasheet.ciiva.com:443/pdfs/VipMasterIC/IC/YAGO/YAGO-S-A0008145938/YAGO-S-A0008145938-1.pdf?src-supplier=IHS+Markit, ComponentLink2Description=https://datasheet.ciiva.com/12555/rc0603-272842-12555287.pdf?src-supplier=Mouser, ComponentLink2URL=https://datasheet.ciiva.com/12555/rc0603-272842-12555287.pdf?src-supplier=Mouser, Construction=Chip, JESD-609 Code=e3, Manufacturer Part Number=RC0603FR-0722K1L, Mounting Technology="Surface Mount", Packaging="Tape and Reel", Pins=2, Pricing="1=0.1, 10=0.009, 100=0.0071, 1000=0.00612, 2500=0.00461 (USD)", Reach SVHC Compliant=Yes, RoHS=Yes, RoHS Compliant=Yes, Stock=45696, Supplier=Digikey, Technology="METAL GLAZE/THICK FILM", Terminal Finish=Nickel, Termination=Wraparound
R4 R7: library part 560112110015, "2 kOhms ±5% 0.1W, 1/10W Chip Resistor 0402 (1005 Metric) Anti-Sulfur Thick Film", Manufacturer="Wurth Electronics", Supplier Part Number=732-560112110015CT-ND, Category="Chip SMD Resistors", Manufacturer Part Number=560112110015, Pricing="1=0.1, 50=0.0496, 500=0.0333, 5000=0.0252 (USD)", RoHS=No, Stock=20000, Supplier=Digikey
R5 R6: library part CR0402AJ/-000GAS, "0 Ohms Jumper Chip Resistor 0402 (1005 Metric) Anti-Sulfur, Automotive AEC-Q200, Moisture Resistant Thick Film", Manufacturer=Bourns, Supplier Part Number=CR0402AJ/-000GASCT-ND, Category="Chip SMD Resistors", ComponentLink1Description=https://datasheet.ciiva.com:443/pdfs/VipMasterIC/IC/BOUR/BOUR-S-A0008933277/BOUR-S-A0008933277-1.pdf?src-supplier=IHS+Markit, ComponentLink1URL=https://datasheet.ciiva.com:443/pdfs/VipMasterIC/IC/BOUR/BOUR-S-A0008933277/BOUR-S-A0008933277-1.pdf?src-supplier=IHS+Markit, ComponentLink2Description=https://www.bourns.com/docs/product-datasheets/crxxxxa-as.pdf?src-supplier=Digikey, ComponentLink2URL=https://www.bourns.com/docs/product-datasheets/crxxxxa-as.pdf?src-supplier=Digikey, ComponentLink3Description=https://datasheet.octopart.com/CR0402AJ--000GAS-Bourns-datasheet-166097895.pdf?src-supplier=Electro+Sonic, ComponentLink3URL=https://datasheet.octopart.com/CR0402AJ--000GAS-Bourns-datasheet-166097895.pdf?src-supplier=Electro+Sonic, Manufacturer Part Number=CR0402AJ/-000GAS, Pricing="1=0.1, 10=0.024, 50=0.0144, 100=0.0117, 500=0.00752, 1000=0.00635, 5000=0.00442 (USD)", RoHS=Yes, Stock=139709, Supplier=Digikey
"RED LED": "Red 630nm LED Indication - Discrete 1.9V 0603 (1608 Metric)", Color=Red, Forward Current=30mA, Manufacturer="Wurth Electronics", Max Operating Temperature=85°C, Min Operating Temperature=-40°C, Supplier Part Number=732-4979-1-ND, Category=LEDs, Channels=1, ComponentLink1Description=https://datasheet.ciiva.com:443/pdfs/VipMasterIC/IC/MIDC/MIDC-S-A0007768811/MIDC-S-A0007768811-1.pdf?src-supplier=IHS+Markit, ComponentLink1URL=https://datasheet.ciiva.com:443/pdfs/VipMasterIC/IC/MIDC/MIDC-S-A0007768811/MIDC-S-A0007768811-1.pdf?src-supplier=IHS+Markit, ComponentLink2Description=https://datasheet.ciiva.com/23843/150060ss75000-23843248.pdf?src-supplier=Newark, ComponentLink2URL=https://datasheet.ciiva.com/23843/150060ss75000-23843248.pdf?src-supplier=Newark, ComponentLink3Description=https://datasheet.ciiva.com/29279/759429-da-01-en-chipled-0603-w-kl-s-rot-150060ss75000-29279208.pdf?src-supplier=Conrad, ComponentLink3URL=https://datasheet.ciiva.com/29279/759429-da-01-en-chipled-0603-w-kl-s-rot-150060ss75000-29279208.pdf?src-supplier=Conrad, ComponentLink4Description=https://datasheet.ciiva.com/48430/150060ss75000-eng-tds-48430042.pdf?src-supplier=Distrelec, ComponentLink4URL=https://datasheet.ciiva.com/48430/150060ss75000-eng-tds-48430042.pdf?src-supplier=Distrelec, Lens Style="WATER CLEAR", Luminous Intensity-Nom=60mcd, Manufacturer Part Number=150060SS75000, Mounting Technology="Surface Mount", Optoelectronic Device Type="SINGLE COLOR LED", Overall Height=0.7mm, Packaging="Tape and Reel", Pins=2, Pricing="1=0.14, 50=0.1278, 100=0.1098, 500=0.10124 (USD)", Reach SVHC Compliant=Yes, RoHS=Yes, RoHS Compliant=Yes, Shape=Rectangular, Size=1.1mm, Stock=41067, Supplier=Digikey, Terminal Pitch=1.6mm, Viewing Angle=140°
SW1 SW2: "Keypad Switch, 1 Switches, SPST, Momentary, 0.05A, 12VDC, 3.92N, Solder Terminal, Surface Mount-straight", Manufacturer="Wurth Electronics", Supplier Part Number=732-10143-1-ND, Category="Tactile Switches", ComponentLink1Description=https://datasheet.ciiva.com:443/pdfs/VipMasterIC/IC/MIDC/MIDC-S-A0007332294/MIDC-S-A0007339011-1.pdf?src-supplier=IHS+Markit, ComponentLink1URL=https://datasheet.ciiva.com:443/pdfs/VipMasterIC/IC/MIDC/MIDC-S-A0007332294/MIDC-S-A0007339011-1.pdf?src-supplier=IHS+Markit, ComponentLink2Description=https://datasheet.ciiva.com/52202/434153017835-52202871.pdf?src-supplier=Digikey, ComponentLink2URL=https://datasheet.ciiva.com/52202/434153017835-52202871.pdf?src-supplier=Digikey, Manufacturer Part Number=434153017835, Pricing="1=0.54, 100=0.4527, 500=0.3969, 1000=0.3195 (USD)", RoHS=Yes, RoHS Compliant=Yes, Stock=10405, Supplier=Digikey
U1: "WiFi-Module 802.11/BT 2, 4-2, 5GHz 150Mb/s", Manufacturer="Espressif Systems", Supplier Part Number=1965-ESP32-WROOM-32E-N4CT-ND, Category=LDO, ComponentLink1Description=https://datasheet.octopart.com/ESP32-WROOM-32E-N4-Espressif-Systems-datasheet-151884363.pdf?src-supplier=Future+Electronics, ComponentLink1URL=https://datasheet.octopart.com/ESP32-WROOM-32E-N4-Espressif-Systems-datasheet-151884363.pdf?src-supplier=Future+Electronics, ComponentLink2Description=https://datasheet.octopart.com/ESP32-WROOM-32E-N4-Espressif-Systems-datasheet-165560559.pdf?src-supplier=TME, ComponentLink2URL=https://datasheet.octopart.com/ESP32-WROOM-32E-N4-Espressif-Systems-datasheet-165560559.pdf?src-supplier=TME, Manufacturer Part Number=ESP32-WROOM-32E-N4, Pricing="1=2.5 (USD)", RoHS=No, Stock=8795, Supplier=Digikey
U2: "USB Bridge, USB to UART USB 2.0 UART Interface 28-QFN (5x5)", Manufacturer="Silicon Labs", Supplier Part Number=336-5889-ND, Category="USB Interface ICs", ComponentLink1Description=https://datasheet.ciiva.com:443/pdfs/VipMasterIC/IC/SILC/SILC-S-A0007770867/SILC-S-A0007770867-1.pdf?src-supplier=IHS+Markit, ComponentLink1URL=https://datasheet.ciiva.com:443/pdfs/VipMasterIC/IC/SILC/SILC-S-A0007770867/SILC-S-A0007770867-1.pdf?src-supplier=IHS+Markit, Manufacturer Part Number=CP2102N-A02-GQFN28, Pricing="1=5.79, 10=3.8, 73=2.81247, 146=2.57027, 292=2.36736, 511=2.22789, 1022=2.175 (USD)", RoHS=Yes, Stock=2154, Supplier=Digikey
U3: library part AMS1117-3.3, "Linear Voltage Regulator IC Positive Fixed 1 Output 1A SOT-223-3L", Manufacturer=Revvo, Supplier Part Number=5272-AMS1117-3.3CT-ND, Category="Voltage Regulators - Linear", Manufacturer Part Number=AMS1117-3.3, Pricing="1=0.63, 10=0.378, 25=0.3108, 100=0.2349, 250=0.19756, 500=0.17458, 1000=0.1553, 2500=0.13454, 5000=0.12177, 7500=0.11528, 12500=0.108, 17500=0.10371, 25000=0.09954, 62500=0.092 (USD)", RoHS=No, Stock=4413, Supplier=Digikey
U4: library part TB6612FNG,C,8,EL, "Brushless DC Motor Controller, 1A, BCDMOS, PDSO24", Manufacturer=Toshiba, Supplier Part Number=TB6612FNGC8ELCT-ND, Category="Motor Drivers", ComponentLink1Description=https://datasheet.ciiva.com/12216/tb6612fng-datasheet-en-20141001-12216529.pdf?src-supplier=Mouser, ComponentLink1URL=https://datasheet.ciiva.com/12216/tb6612fng-datasheet-en-20141001-12216529.pdf?src-supplier=Mouser, Manufacturer Part Number=TB6612FNG,C,8,EL, Pricing="1=2.89, 10=1.828, 25=1.5512, 100=1.2378, 250=1.08392, 500=0.98924, 1000=0.90997 (USD)", RoHS=Yes, Stock=22646, Supplier=Digikey
U5: "Bipolar (BJT) Transistor Array Through Hole 16-DIP", Collector-emitter Voltage-Max=50V, DC Current Gain-Min (hFE)=1000, Manufacturer=STMicroelectronics, Max Collector Current=500mA, Max Operating Temperature=150°C, Package Body Material=Plastic, Package Shape=Rectangular, Package Style=IN-LINEMeter, Supplier Part Number=497-2344-5-ND, Category="Integrated Circuits (ICs)", ComponentLink1Description=https://datasheet.ciiva.com:443/pdfs/VipMasterIC/IC/SGST/SGST-S-A0008658005/SGST-S-A0008658005-1.pdf?src-supplier=IHS+Markit, ComponentLink1URL=https://datasheet.ciiva.com:443/pdfs/VipMasterIC/IC/SGST/SGST-S-A0008658005/SGST-S-A0008658005-1.pdf?src-supplier=IHS+Markit, ComponentLink2Description=https://datasheet.ciiva.com/15139/getdatasheetpartid-94437-15139993.pdf?src-supplier=Verical, ComponentLink2URL=https://datasheet.ciiva.com/15139/getdatasheetpartid-94437-15139993.pdf?src-supplier=Verical, ComponentLink3Description=https://datasheet.ciiva.com/29305/177970-da-01-en-uln2003-29305675.pdf?src-supplier=Conrad, ComponentLink3URL=https://datasheet.ciiva.com/29305/177970-da-01-en-uln2003-29305675.pdf?src-supplier=Conrad, ComponentLink4Description=https://datasheet.ciiva.com/1701/cd00001244-1701923.pdf?src-supplier=Digikey, ComponentLink4URL=https://datasheet.ciiva.com/1701/cd00001244-1701923.pdf?src-supplier=Digikey, ComponentLink5Description=https://datasheet.ciiva.com/4459/cd00001244-4459193.pdf?src-supplier=Mouser, ComponentLink5URL=https://datasheet.ciiva.com/4459/cd00001244-4459193.pdf?src-supplier=Mouser, ComponentLink6Description=https://datasheet.ciiva.com/14180/luuln2001-04-data-e-14180135.pdf?src-supplier=Distrelec, ComponentLink6URL=https://datasheet.ciiva.com/14180/luuln2001-04-data-e-14180135.pdf?src-supplier=Distrelec, ComponentLink7Description=https://datasheet.ciiva.com/6884/1690348-6884665.pdf?src-supplier=Newark, ComponentLink7URL=https://datasheet.ciiva.com/6884/1690348-6884665.pdf?src-supplier=Newark, ComponentLink8Description=https://datasheet.ciiva.com/1193/1690348-1193404.pdf?src-supplier=Element14, ComponentLink8URL=https://datasheet.ciiva.com/1193/1690348-1193404.pdf?src-supplier=Element14, JESD-30 Code=R-PDIP-T16, JESD-609 Code=e3, Manufacturer Part Number=ULN2003A, Number of Elements=7, Pins=16, Polarity/Channel Type=NPN, Pricing="1=0.43, 10=0.297, 25=0.2648, 100=0.2293, 250=0.21236, 500=0.20216, 1000=0.19375, 2500=0.18488, 5000=0.17954 (USD)", Qualification Status="Not Qualified", Reach SVHC Compliant=Yes, RoHS=Yes, RoHS Compliant=Yes, Stock=38293, Supplier=Digikey, Surface Mount=No, Terminal Finish=Tin, Terminal Form="Through Hole", Terminal Position=DUAL, Transistor Application=SWITCHING, Transistor Element Material=SILICON, VCEsat-Max=1.6V

## Via types
v1: diameter 1.27, hole 0.711, Top Layer to Bottom Layer, 10 vias

## Nets (pads, with @x,y where several pads share a name; then routed paths per layer and width w, separated by ;. In a path a pad name is that pad's centre, name@x,y a point inside that pad or via, vN(x,y) a via of type N, cw(c..) or ccw(c..) an arc to the next point about the centre after c; other vN are vias at no path point)
DTR: Q2.2 R8.1 U2.28 | length 17.3
  Top Layer w0.3: Q2.2 107.401,52.1 109.7,52.1 111.121,53.521 R8.1 111.121,56.121 113.1,58.1 113.1,61.1 112.7,61.5 U2.28
EN: C3.2 Q1.3 R1.1 SW1.B1 SW1.B2 U1.3 | length 45.8
  Top Layer w0.3: Q1.3 123.224,51.15 ; U1.3 123.854,30.554 ; v1(124.3,32.6) 124.3,31 123.854,30.554 ; v1(124.5,45.5) 124.4,45.6 124.4,47.576 ; R1.1 126,31.6 125,30.6 123.9,30.6 123.854,30.554 ; C3.2 124.576,47.4 124.4,47.576 ; SW1.B2 127.95,50 124.374,50 ; SW1.B1 128.25,53.7 125,53.7 123.4,52.1 123.4,51.326 123.224,51.15 ; 123.224,51.15 124.374,50 ; 124.374,50 124.4,49.974 124.4,47.576
  Bottom Layer w0.3: v1(124.3,32.6) 124.4,32.7 124.4,45.4 v1(124.5,45.5)
GND: "RED LED.1" C1.1 C2.1 C3.1 C4.1 C6.2 C8.1 C9.1 C10.2 C11.1 J1.5 JP3.2 JP4.2 JP5.2 R2.2 SW1.A1 SW1.A2 SW2.A1 SW2.A2 U1.1 U1.15 U1.38 U1.39 U2.3 U2.29 U3.3 U4.3 U4.4 U4.9 U4.10 U4.18 U5.8 | length 34.1
  Top Layer w0.3: C11.1 95.3,48.7 94.4,49.6 v1(94.4,53.1) ; SW2.A1 96.05,51.45 v1(94.4,53.1) ; SW2.A2 96.1,54.8 v1(94.4,53.1) ; SW1.A2 129.95,50.1 131.9,50.1 132.1,50.3 v1(132.1,51.8) 132.1,53.1 131.699,53.501 131.525,53.675 SW1.A1 ; C3.1 v1(132.1,47.4) ; C1.1 132.2,27.7 133.6,29.1 v1(133.6,29.3) 133.6,31.1 132.9,31.8 C2.1
GPIO0: C11.2 Q2.3 R10.1 SW2.B1 SW2.B2 U1.25 | length 29.4
  Top Layer w0.3: R10.1 102.5,44.6 ; SW2.B1 102.05,51.45 ; SW2.B2 101.5,54.8 102.1,54.2 102.1,51.5 102.05,51.45 ; C11.2 102.05,48.7 ; U1.25 104.458,44.6 102.5,44.6 ; Q2.3 102.65,51.2 102.05,50.6 ; 102.05,48.7 102.05,45.05 102.5,44.6 ; 102.05,48.7 102.05,50.6 ; 102.05,50.6 102.05,51.45
GPIO2: U1.24
GPIO4: JP1.5 U1.26
GPIO5: JP1.4 U1.29
GPIO12: U1.14 U4.17
GPIO13: U1.16 U4.16
GPIO14: U1.13 U4.15
GPIO15: JP1.6 U1.23
GPIO16: U1.27 U4.21
GPIO17: U1.28 U4.22
GPIO18: U1.30 U4.23
GPIO19: U1.31 U4.19
GPIO21: JP1.3 U1.33
GPIO22: JP1.2 U1.36
GPIO23: JP1.1 U1.37
GPIO25: U1.10
GPIO26: U1.11
GPIO27: U1.12
GPIO32: U1.8 U5.1
GPIO33: U1.9 U5.2
GPIO34: U1.6 U5.3
GPIO35: U1.7 U5.4
NetC5_1: C5.1 C7.2 U4.13 U4.14 U4.24
NetC5_2: C5.2 C7.1
NetC10_1: C10.1 JP2.1 JP2.2 JP2.3 JP2.4 JP2.5 U5.9 U5.13 U5.14 U5.15 U5.16
NetJPA_2: JPA.2 U4.5 U4.6
NetJPA_9: U4.1 U4.2
NetJPB_2: JPB.2 U4.7 U4.8
NetJPB_9: U4.11 U4.12
NetQ1_1: Q1.1 R8.2 | length 7.3
  Top Layer w0.3: R8.2 114.4,54.4 116.7,52.1 Q1.1
NetQ2_1: Q2.1 R9.2 | length 5.6
  Top Layer w0.3: Q2.1 107.376,50.275 112.918,50.275 R9.2
NetR2_1: R2.1 R3.1 U2.8 | length 0.1
  Top Layer w0.3: R2.1@122.899,65.424 R2.1
NetR4_2: R4.2 U2.9 | length 0.1
  Top Layer w0.3: R4.2@100,61.7 R4.2
NetR5_1: R5.1 U2.25
NetR6_2: R6.2 U2.26
NetR7_1: R7.1
RTS: Q1.2 R9.1 U2.24 | length 17.7
  Top Layer w0.3: U2.24 110.2,59.5 v1(111.4,58.3) ; v1(111.7,52.3) 113.5,52.3 113.9,51.9 R9.1 113.95,50.25 118.35,50.25 Q1.2
  Bottom Layer w0.3: v1(111.4,58.3) 111.55,58.15 111.55,52.45 v1(111.7,52.3)
RXD0: R6.1 U1.34 | length 3.2
  Top Layer w0.3: R6.1 104.474,33.154 U1.34
SENSOR_VN: U1.5
SENSOR_VP: U1.4
TXD0: R5.2 U1.35 | length 3.2
  Top Layer w0.3: R5.2 104.51,31.8 U1.35
USB_D_N: J1.2 U2.5 | length 13.3
  Top Layer w0.25: v1(105.3,65.1) 105.3,65.072 106,64.372 U2.5 ; v1(107.7,65.7) 107.81,65.81 108.71,65.81 109.562,66.662 112.319,66.662 113.175,67.518 113.175,67.963 113.175,68.7 J1.2
  Bottom Layer w0.25: v1(105.3,65.1) 105.528,65.1 106.128,65.7 v1(107.7,65.7)
USB_D_P: J1.3 U2.4 | length 12.1
  Top Layer w0.25: U2.4 106.5,66.7 106.962,67.162 112.112,67.162 112.675,67.725 112.675,67.945 112.675,68.7 J1.3
  Top Layer w0.381: J1.3 J1.3@112.608,68.767
VBUS: D1.A J1.1 R3.2 | length 6.3
  Top Layer w0.5: J1.1 113.9,66.9 115.3,65.5 D1.A
VDD33: C1.2 C2.2 C4.2 C6.1 C9.2 R1.2 R4.1 R10.2 U1.2 U2.6 U2.7 U3.2 U3.4 U4.20 | length 10.3
  Top Layer w0.5: U1.2 125.484,29.284 ; C2.2 127.65,31.45 125.484,29.284 ; C1.2 127.068,27.7 125.484,29.284
VIN: C8.2 D1.C R7.2 U3.1
pads on no net: "RED LED.2" J1.4 J1.S1 J1.S2 J1.S3 J1.S4 J1.S5 J1.S6 JP3.1 JP4.1 JP5.1 JPA.1 JPB.1 U1.17 U1.18 U1.19 U1.20 U1.21 U1.22 U1.32 U2.1 U2.2 U2.10 U2.11 U2.12 U2.13 U2.14 U2.15 U2.16 U2.17 U2.18 U2.19 U2.20 U2.21 U2.22 U2.23 U2.27 U5.5 U5.6 U5.7 U5.10 U5.11 U5.12

## Text inside footprints (layer, text, board x,y; h text height)
J1: Top 3D Body "PCB Edge" at 107.5,72.575 h0.41 r180